# Altium PCB S7CAS-PLEIADES-CARTE-MERE_P06.PcbDoc (part 3 of 3)
Units mil, origin at the board's own origin, x right, y up, seen from the top; angles counter-clockwise.
Board outline 5000 x 5000 mil, 12 copper layers (Top Layer, GND1, SIG1, GND2, PWR1, GND3, GND4, PWR2, GND5, SIG2, GND6, Bottom), stack 47.089 mil thick; 447 components, 336 nets, 2150 pads, 232 vias.
Unrouted connection lines stored in the file: 1376.
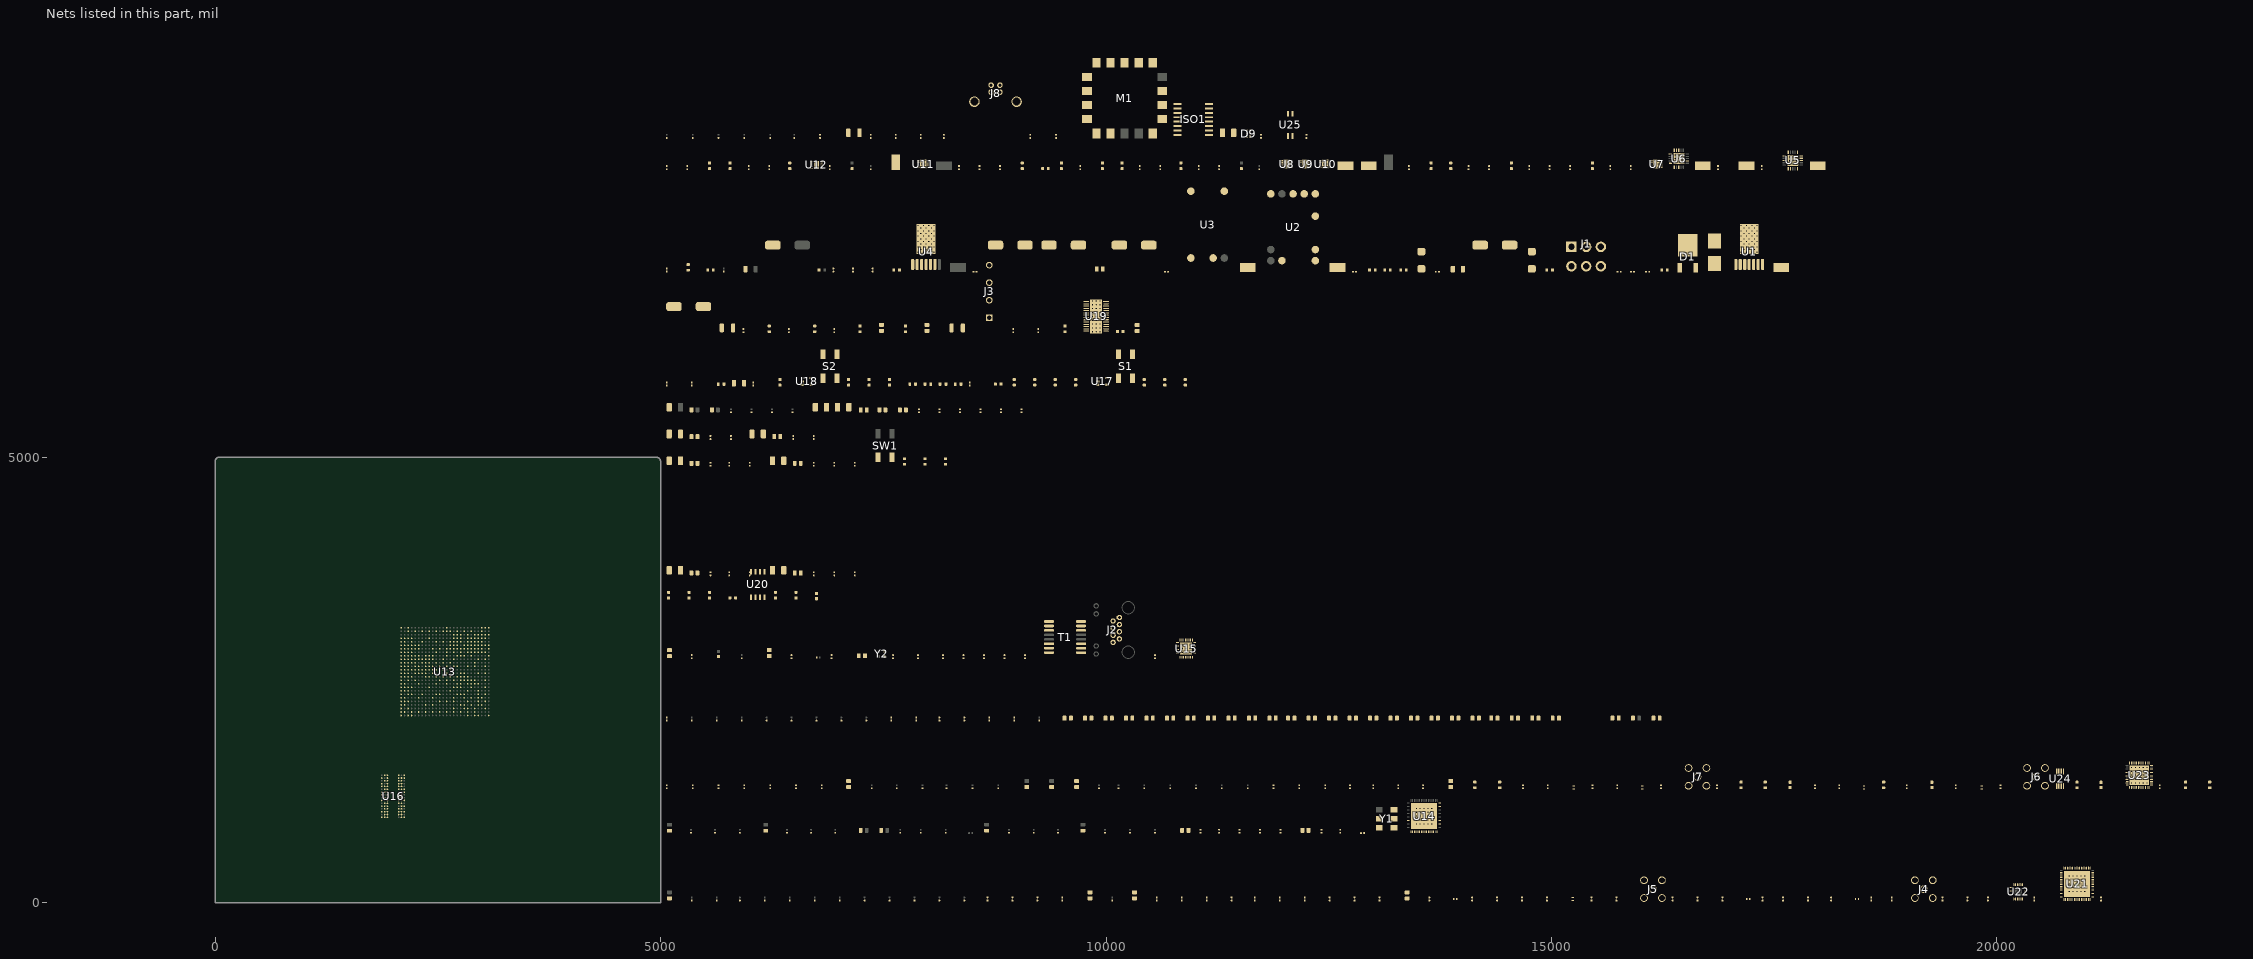
[diagram p11: the nets of this part, all layers, seen from the top]

## Via types
v1: diameter 19.68, hole 7.87, Top Layer to Bottom, 106 vias
v2: diameter 20, hole 10, Top Layer to Bottom, 78 vias
v3: diameter 15.75, hole 7.87, Top Layer to Bottom, 30 vias
v4: diameter 22, hole 12, Top Layer to Bottom, 9 vias
v5: diameter 19.68, hole 11.81, Top Layer to Bottom, 9 vias

## Nets (pads, with @x,y where several pads share a name; then routed paths per layer and width w, separated by ;. In a path a pad name is that pad's centre, name@x,y a point inside that pad or via, vN(x,y) a via of type N, cw(c..) or ccw(c..) an arc to the next point about the centre after c; other vN are vias at no path point) (continued)
3V3D: C26.2 C30.2 C32.2 C44.2 C45.2 C46.2 C47.2 C48.2 C49.2 C50.2 C51.2 C52.2 C53.2 C54.2 C55.2 C56.2 C57.2 C58.2 C59.2 C60.2 C61.2 C62.2 C63.2 C64.2 C65.2 C66.2 C67.2 C68.2 C69.2 C70.2 C71.2 C79.2 C80.2 C81.2 C82.2 C83.2 C84.2 C85.2 C86.2 C87.2 C88.2 C89.2 C90.2 C127.2 C128.2 C149.2 C150.2 ISO1.12 ISO1.13 ISO1.14 ISO1.16 L1.2 M1.2 M1.8 M1.15 R13.2 R16.2 R17.2 R18.2 R28.2 R29.2 R30.2 R33.2 R34.2 R69.2 R70.2 R72.2 R73.2 R74.2 R75.2 R77.2 R78.2 R81.2 R84.2 R110.2 R111.2 S1.3 S1.4 S2.3 S2.4 TP7.1 TP8.1 TP9.1 U7.9 U7.10 U8.9 U8.10 U9.9 U9.10 U13.AA6 U13.AA10 U13.AA16 U13.AA21 U13.AB14 U13.AB23 U13.AC10 U13.AC18 U13.AC21 U13.AD25 U13.AE8 U13.AE12 U13.AE16 U13.AE20 U13.AF22 U13.B3 U13.B7 U13.B11 U13.B15 U13.B19 U13.C22 U13.D2 U13.D9 U13.D17 U13.D25 U13.E13 U13.F4 U13.F6 U13.F21 U13.F23 U13.G10 U13.G12 U13.G15 U13.G18 U13.H2 U13.H14 U13.H25 U13.J6 U13.J9 U13.J18 U13.J21 U13.K4 U13.K13 U13.K23 U13.L5 U13.L22 U13.M2 U13.M17 U13.M20 U13.M25 U13.N10 U13.P23 U13.T25 U13.U6 U13.U14 U13.U18 U13.V9 U13.V21 U13.W23 U13.Y12 U13.Y17 U13.Y19 U13.Y25 U14.8 U14.11 U14.18 U14.21 U14.26 U14.29 U14.32 U15.17 U17.3 U18.3 U19.10 U25.4
3V3FLASH: C102.2 R89.2 R90.2 R92.2 R93.2 U20.8
3V6: C10.1 C25.2 C29.2 C31.2 C33.2 C38.2 C40.2 TP2.1 U2.5 U2.6 U7.1 U7.2 U7.4 U8.1 U8.2 U8.4 U8.5 U9.1 U9.2 U9.4 U10.1 U10.2 U10.4 U11.1 U11.2 U11.4 U12.1 U12.2 U12.3
5V: C20.2 C192.2 C193.2 C194.2 C195.2 C196.2 TP5.1 U5.1 U5.3 U5.20 U22.3 U22.4 U22.9 U22.10 U22.14 U22.20 U24.8
5V8: C4.2 C5.2 C6.1 C8.1 C9.2 C12.2 C13.2 C14.2 C19.2 R2.2 R8.2 TP1.1 U1.7 U2.2 U2.10 U3.2 U4.1 U5.15 U5.16
5VA: C214.2 C215.2
24V: C1.2 C2.2 C3.2 C151.2 C153.2 C155.2 C159.1 D1.3 D2.1 R1.2 R80.2 U1.1 U19.15 U19.28
100M_CLK_N: U13.A14 U14.28
100M_CLK_P: U13.B14 U14.27
200M_CLK_N: C163.2 R95.1 U14.20
200M_CLK_P: C162.2 R95.2 U14.19
400M_CLK_N: C200.2 R116.1 U14.17
400M_CLK_P: C199.2 R116.2 U14.16
-5V: C23.2 C24.2 C174.2 C175.2 C176.2 C177.2 C178.2 R12.2 TP6.1 U6.1 U6.20 U22.15 U22.16 U22.21 U22.22 U24.4
-5V5: C11.2 C22.2 TP3.1 U3.5 U6.15 U6.16
-5VA: C231.2 C232.2
ADC_AVDD: C167.2 C168.2 C169.2 C170.2 C171.2 C172.2 C173.2 L12.1 U21.16 U21.33 U21.34
ADC_CLKOUT_N: U13.G5 U21.56
ADC_CLKOUT_P: U13.G6 U21.57
ADC_CM: C161.2 C165.2 U21.23 U22.11 U22.17
ADC_CTRL1: U13.J10 U21.35
ADC_CTRL2: U13.K9 U21.36
ADC_CTRL3: U13.E4 U21.37
ADC_DA0_N: U13.L8 U21.40
ADC_DA0_P: U13.K8 U21.41
ADC_DA2_N: U13.N1 U21.42
ADC_DA2_P: U13.N2 U21.43
ADC_DA4_N: U13.M1 U21.44
ADC_DA4_P: U13.M3 U21.45
ADC_DA6_N: U13.L1 U21.46
ADC_DA6_P: U13.L2 U21.47
ADC_DA8_N: U13.K1 U21.50
ADC_DA8_P: U13.K3 U21.51
ADC_DA10_N: U13.J1 U21.52
ADC_DA10_P: U13.J2 U21.53
ADC_DA12_N: U13.H1 U21.54
ADC_DA12_P: U13.H3 U21.55
ADC_DB0_N: U13.G1 U21.60
ADC_DB0_P: U13.G2 U21.61
ADC_DB2_N: U13.F1 U21.62
ADC_DB2_P: U13.F3 U21.63
ADC_DB4_N: U13.E1 U21.2
ADC_DB4_P: U13.E2 U21.3
ADC_DB6_N: U13.D1 U21.4
ADC_DB6_P: U13.D3 U21.5
ADC_DB8_N: U13.J3 U21.6
ADC_DB8_P: U13.J4 U21.7
ADC_DB10_N: U13.K6 U21.8
ADC_DB10_P: U13.K7 U21.9
ADC_DB12_N: U13.J5 U21.10
ADC_DB12_P: U13.K5 U21.11
ADC_Reset: U13.G4 U21.12
ADC_SCLK: U13.G3 U21.13
ADC_SDATA: U13.L9 U21.14
ADC_SDOUT: U13.F5 U21.64
ADC_SEN: U13.K10 U21.15
BTN0: C147.2 R68.2 U13.D18
BTN1: C148.2 R76.2 U13.C18
CLK_N: U14.46 Y1.5
CLK_P: U14.45 Y1.4
CLOCK_PWRDN: R31.1 U13.Y18
CLOCK_SPI_CLK: U13.AC19 U14.24
CLOCK_SPI_LE: U13.AA19 U14.25
CLOCK_SPI_MISO: U13.V16 U14.22
CLOCK_SPI_MOSI: U13.AD19 U14.23
DAC_AVDD: C208.2 C209.2 C210.2 C211.2 C212.2 C213.2 C218.2 C225.2 C226.2 C227.2 C228.2 C229.2 C230.2 L17.1 U23.37 U23.40 U23.45 U23.48
DAC_CLK_N: U13.A25 U23.18
DAC_CLK_P: U13.B24 U23.17
DAC_CS: U13.H24 U23.33
DAC_D0_N: U13.G21 U23.28
DAC_D0_P: U13.G20 U23.27
DAC_D1_N: U13.C24 U23.26
DAC_D1_P: U13.D23 U23.25
DAC_D2_N: U13.D22 U23.24
DAC_D2_P: U13.F22 U23.23
DAC_D3_N: U13.H21 U23.22
DAC_D3_P: U13.H20 U23.21
DAC_D4_N: U13.G22 U23.16
DAC_D4_P: U13.H22 U23.15
DAC_D5_N: U13.E24 U23.14
DAC_D5_P: U13.E23 U23.13
DAC_D6_N: U13.G24 U23.12
DAC_D6_P: U13.G23 U23.11
DAC_D7_N: U13.G19 U23.10
DAC_D7_P: U13.H18 U23.9
DAC_FRAME_N: U13.C26 U23.20
DAC_FRAME_P: U13.C25 U23.19
DAC_IRQ: R110.1 U13.G26 U23.34
DAC_RST: R111.1 U13.D24 U23.36
DAC_SDIO: U13.F26 U23.31
DAC_TX_EN: U13.J26 U23.30
DDR3_A0: R43.1 U13.N7 U16.N3
DDR3_A1: R44.1 U13.N6 U16.P7
DDR3_A2: R45.1 U13.R9 U16.P3
DDR3_A3: R46.1 U13.P7 U16.N2
DDR3_A4: R47.1 U13.N9 U16.P8
DDR3_A5: R48.1 U13.R2 U16.P2
DDR3_A6: R49.1 U13.R1 U16.R8
DDR3_A7: R50.1 U13.P10 U16.R2
DDR3_A8: R51.1 U13.N4 U16.T8
DDR3_A9: R52.1 U13.N3 U16.R3
DDR3_A10: R53.1 U13.M10 U16.L7
DDR3_A11: R54.1 U13.L3 U16.R7
DDR3_A12: R55.1 U13.M8 U16.N7
DDR3_A13: R56.1 U13.M6 U16.T3
DDR3_BA0: R57.1 U13.P3 U16.M2
DDR3_BA1: R58.1 U13.P1 U16.N8
DDR3_BA2: R59.1 U13.N5 U16.M3
DDR3_CAS: R63.1 U13.P8 U16.K3
DDR3_CKE0: R60.1 U13.M9 U16.K9
DDR3_CLK0_N: R66.1 U13.R3 U16.K7
DDR3_CLK0_P: R66.2 U13.R4 U16.J7
DDR3_CS: R61.1 U13.L7 U16.L2
DDR3_DQ0: U13.Y3 U16.E3
DDR3_DQ1: U13.Y1 U16.F7
DDR3_DQ2: U13.W2 U16.F2
DDR3_DQ3: U13.W1 U16.F8
DDR3_DQ4: U13.T3 U16.H3
DDR3_DQ5: U13.T1 U16.H8
DDR3_DQ6: U13.U2 U16.G2
DDR3_DQ7: U13.U1 U16.H7
DDR3_DQ8: U13.AA2 U16.D7
DDR3_DQ9: U13.AA1 U16.C3
DDR3_DQ10: U13.AE2 U16.C8
DDR3_DQ11: U13.AE1 U16.C2
DDR3_DQ12: U13.AD3 U16.A7
DDR3_DQ13: U13.AD1 U16.A2
DDR3_DQ14: U13.AB3 U16.B8
DDR3_DQ15: U13.AB1 U16.A3
DDR3_LDM: U13.W3 U16.E7
DDR3_LDQS_N: U13.V1 U16.G3
DDR3_LDQS_P: U13.V3 U16.F3
DDR3_ODT: R65.1 U13.P6 U16.K1
DDR3_RAS: R62.1 U13.N8 U16.J3
DDR3_RESET: R42.2 U13.L4 U16.T2
DDR3_UDM: U13.V4 U16.D3
DDR3_UDQS_N: U13.AC1 U16.B7
DDR3_UDQS_P: U13.AC2 U16.C7
DDR3_WE: R64.1 U13.P5 U16.L3
DDRVTT: C140.2 C141.2 C142.2 C143.2 C144.2 C145.2 R43.2 R44.2 R45.2 R46.2 R47.2 R48.2 R49.2 R50.2 R51.2 R52.2 R53.2 R54.2 R55.2 R56.2 R57.2 R58.2 R59.2 R60.2 R61.2 R62.2 R63.2 R64.2 R65.2
DONE_2: R28.1 SW1.1 U13.AF23
ENABLE: R16.1 U5.13 U6.13 U7.5 U8.3 U9.5 U10.5 U11.5 U12.5
ETH_COL: U13.R17 U15.28
ETH_CRS: U13.R18 U15.29
ETH_INTRP: R34.1 U13.T22 U15.21
ETH_MDC: U13.R19 U15.12
ETH_MDIO: R33.1 U13.R20 U15.11
ETH_Reset: U13.P18 U15.32
ETH_RXC: U13.V17 U15.19
ETH_RXD0: U13.T19 U15.16
ETH_RXD1: U13.U21 U15.15
ETH_RXD2: U13.U22 U15.14
ETH_RXD3: U13.U17 U15.13
ETH_RXDV: U13.U23 U15.18
ETH_RXER: U13.T18 U15.20
ETH_TXC: U13.V18 U15.22
ETH_TXD0: U13.T20 U15.24
ETH_TXD1: U13.U20 U15.25
ETH_TXD2: U13.AC23 U15.26
ETH_TXD3: U13.AC24 U15.27
ETH_TXEN: U13.AA23 U15.23
ETH_TXER: U13.AA24 U15.31
GND: C1.1 C2.1 C3.1 C4.1 C5.1 C6.2 C7.1 C8.2 C9.1 C10.2 C11.1 C12.1 C13.1 C14.1 C15.1 C16.1 C17.2 C18.1 C19.1 C20.1 C21.1 C22.1 C24.1 C25.1 C26.1 C27.1 C28.1 C29.1 C30.1 C31.1 C32.1 C33.1 C34.1 C35.1 C36.1 C37.1 C38.1 C39.1 C40.1 C41.1 C42.1 C43.1 C44.1 C45.1 C46.1 C47.1 C48.1 C49.1 C50.1 C51.1 C52.1 C53.1 C54.1 C55.1 C56.1 C57.1 C58.1 C59.1 C60.1 C61.1 C62.1 C63.1 C64.1 C65.1 C66.1 C67.1 C68.1 C69.1 C70.1 C71.1 C72.1 C73.1 C74.1 C75.1 C76.1 C77.1 C78.1 C79.1 C80.1 C81.1 C82.1 C83.1 C84.1 C85.1 C86.1 C87.1 C88.1 C89.1 C90.1 C91.1 C92.1 C93.1 C94.1 C95.1 C96.1 C97.1 C98.1 C99.1 C100.1 C101.1 C102.1 C103.1 C104.1 C105.1 C106.1 C108.1 C109.1 C110.1 C111.1 C113.1 C114.1 C115.1 C116.1 C118.1 C119.1 C120.1 C121.1 C122.1 C123.1 C124.2 C125.1 C126.1 C127.1 C128.1 C129.1 C130.1 C132.1 C133.1 C134.1 C135.1 C136.1 C137.1 C138.1 C139.1 C140.1 C141.1 C142.1 C143.1 C144.1 C145.1 C146.1 C147.1 C148.1 C149.1 C150.1 C151.1 C152.1 C155.1 C156.1 C157.1 C158.1 C159.2 C161.1 C165.1 C167.1 C168.1 C169.1 C170.1 C171.1 C172.1 C173.1 C174.1 C175.1 C176.1 C177.1 C178.1 C179.1 C180.1 C181.1 C182.1 C183.1 C184.1 C185.1 C186.1 C187.1 C188.1 C189.1 C190.1 C191.1 C192.1 C193.1 C194.1 C195.1 C196.1 C197.1 C202.1 C203.1 C204.1 C205.1 C206.1 C207.1 C208.1 C209.1 C210.1 C211.1 C212.1 C213.1 C214.1 C215.1 C216.1 C217.1 C218.1 C219.1 C220.1 C221.1 C222.1 C223.1 C224.1 C225.1 C226.1 C227.1 C228.1 C229.1 C230.1 C231.1 C232.1 C236.1 C237.1 C238.1 C239.1 C240.1 C241.1 C242.1 D3.2 D8.K ISO1.9 ISO1.15 J1.4 J1.5 J1.6 J4.2 J4.3 J4.4 J4.5 J5.2 J5.3 J5.4 J5.5 J6.2 J6.3 J6.4 J6.5 J7.2 J7.3 J7.4 J7.5 M1.1 M1.7 M1.14 R3.1 R4.1 R5.1 R6.1 R7.1 R10.1 R11.1 R14.1 R15.1 R20.1 R21.1 R22.1 R25.1 R26.1 R32.1 R39.1 R41.1 R42.1 R67.1 R71.1 R79.1 R82.1 R83.1 R85.1 R86.1 R87.1 R88.1 R94.1 R99.1 R100.2 R106.1 R107.2 R113.1 R118.1 R119.1 R120.1 R125.1 R126.1 R127.1 R129.1 SW1.3 U1.2 U1.4 U1.8 U2.3 U2.4 U2.7 U3.1 U4.2 U4.4 U4.8 U5.6 U5.7 U5.10 U5.E1 U6.7 U6.21 U7.6 U7.11 U8.6 U8.11 U9.6 U9.11 U10.6 U10.11 U11.6 U11.11 U12.4 U12.8 U12.11 U13.A1 U13.A3 U13.A26 U13.AB2 U13.AB12 U13.AB16 U13.AB20 U13.AB25 U13.AC8 U13.AD16 U13.AE6 U13.AE10 U13.AE14 U13.AE18 U13.AE22 U13.AF1 U13.AF26 U13.B5 U13.B9 U13.B13 U13.B17 U13.B21 U13.D4 U13.E7 U13.E11 U13.E15 U13.E22 U13.F2 U13.F19 U13.F25 U13.H4 U13.H11 U13.H23 U13.J8 U13.J19 U13.K2 U13.K16 U13.K25 U13.L11 U13.L13 U13.L15 U13.M5 U13.M12 U13.M14 U13.M16 U13.M22 U13.N11 U13.N13 U13.N15 U13.P2 U13.P12 U13.P14 U13.P16 U13.P19 U13.P25 U13.R8 U13.R11 U13.R13 U13.R15 U13.T5 U13.T12 U13.T14 U13.T16 U13.T21 U13.U11 U13.V2 U13.V25 U13.W15 U13.W20 U13.Y4 U13.Y7 U13.Y11 U13.Y23 U14.36 U14.43 U14.PAD U15.1 U15.33 U15.34 U15.35 U15.36 U15.37 U15.38 U15.39 U15.40 U15.41 U15.42 U16.A9 U16.B1 U16.B3 U16.B9 U16.D1 U16.D8 U16.E1 U16.E2 U16.E8 U16.F9 U16.G1 U16.G8 U16.G9 U16.J2 U16.J8 U16.M1 U16.M9 U16.P1 U16.P9 U16.T1 U16.T9 U17.2 U18.2 U19.7 U19.21 U19.PAD U20.4 U21.17 U21.18 U21.21 U21.24 U21.27 U21.28 U21.31 U21.32 U21.39 U21.49 U21.59 U21.PAD U23.5 U23.41 U23.44 U23.PAD Y1.3 Y2.2
  other v1: 20813.39,123.39 20856.69,123.39 20900,123.39 20943.31,123.39 20986.61,123.39 20813.39,166.69 20856.69,166.69 20900,166.69 20943.31,166.69 20986.61,166.69 20813.39,210 20856.69,210 20900,210 20943.31,210 20986.61,210 20813.39,253.31 20856.69,253.31 20900,253.31 20943.31,253.31 20986.61,253.31 20813.39,296.61 20856.69,296.61 20900,296.61 20943.31,296.61 20986.61,296.61 13483.39,883.39 13526.69,883.39 13570,883.39 13613.31,883.39 13656.61,883.39 13483.39,926.69 13526.69,926.69 13570,926.69 13613.31,926.69 13656.61,926.69 13483.39,970 13526.69,970 13570,970 13613.31,970 13656.61,970 13483.39,1013.31 13526.69,1013.31 13570,1013.31 13613.31,1013.31 13656.61,1013.31 13483.39,1056.61 13526.69,1056.61 13570,1056.61 13613.31,1056.61 13656.61,1056.61 21513.39,1343.39 21556.69,1343.39 21600,1343.39 21643.31,1343.39 21686.61,1343.39 21513.39,1386.69 21556.69,1386.69 21600,1386.69 21643.31,1386.69 21686.61,1386.69 21513.39,1430 21556.69,1430 21600,1430 21643.31,1430 21686.61,1430 21513.39,1473.31 21556.69,1473.31 21600,1473.31 21643.31,1473.31 21686.61,1473.31 21513.39,1516.61 21556.69,1516.61 21600,1516.61 21643.31,1516.61 21686.61,1516.61 9846.69,6406.77 9890,6406.77 9933.31,6406.77 9846.69,6450.08 9890,6450.08 9933.31,6450.08 9846.69,6493.39 9890,6493.39 9933.31,6493.39 9846.69,6536.69 9890,6536.69 9933.31,6536.69 9846.69,6580 9890,6580 9933.31,6580 9846.69,6623.31 9890,6623.31 9933.31,6623.31 9846.69,6666.61 9890,6666.61 9933.31,6666.61 9846.69,6709.92 9890,6709.92 9933.31,6709.92 9846.69,6753.23 9890,6753.23 9933.31,6753.23
  other v2: 7890,7300 7950,7300 8010,7300 8070,7300 17130,7300 17190,7300 17250,7300 17310,7300 7920,7330 7980,7330 8040,7330 17160,7330 17220,7330 17280,7330 7890,7360 7950,7360 8010,7360 8070,7360 17130,7360 17190,7360 17250,7360 17310,7360 7920,7390 7980,7390 8040,7390 17160,7390 17220,7390 17280,7390 7890,7420 7950,7420 8010,7420 8070,7420 17130,7420 17190,7420 17250,7420 17310,7420 7920,7450 7980,7450 8040,7450 17160,7450 17220,7450 17280,7450 7890,7480 7950,7480 8010,7480 8070,7480 17130,7480 17190,7480 17250,7480 17310,7480 7920,7510 7980,7510 8040,7510 17160,7510 17220,7510 17280,7510 7890,7540 7950,7540 8010,7540 8070,7540 17130,7540 17190,7540 17250,7540 17310,7540 7920,7570 7980,7570 8040,7570 17160,7570 17220,7570 17280,7570 7890,7600 7950,7600 8010,7600 8070,7600 17130,7600 17190,7600 17250,7600 17310,7600
  other v3: 7930.31,8250.63 7969.69,8250.63 12010.31,8250.63 12049.69,8250.63 12220.31,8250.63 12259.69,8250.63 12440.31,8250.63 12479.69,8250.63 16160.32,8250.63 16199.68,8250.63 7930.31,8290 7969.69,8290 12010.31,8290 12049.69,8290 12220.31,8290 12259.69,8290 12440.31,8290 12479.69,8290 16160.32,8290 16199.68,8290 7930.31,8329.37 7969.69,8329.37 12010.31,8329.37 12049.69,8329.37 12220.31,8329.37 12259.69,8329.37 12440.31,8329.37 12479.69,8329.37 16160.32,8329.37 16199.68,8329.37
  other v4: 17670.63,8290.63 17710,8290.63 17749.37,8290.63 17670.63,8330 17710,8330 17749.37,8330 17670.63,8369.37 17710,8369.37 17749.37,8369.37
  other v5: 16390.63,8310.63 16430,8310.63 16469.37,8310.63 16390.63,8350 16430,8350 16469.37,8350 16390.63,8389.37 16430,8389.37 16469.37,8389.37
"GND USB": C233.1 C234.1 C235.2 C236.2 D9.3 D9.8 ISO1.2 ISO1.8 J8.4 R134.1 U25.2
JTAG_TCK: M1.10 U13.E21
JTAG_TDI: M1.12 U13.F20
JTAG_TDO: M1.11 U13.A24
JTAG_TMS: M1.13 U13.C23
LED0: D4.K U13.E18
LED1: D5.K U13.E20
LED2: D6.K U13.D20
LED3: D7.K U13.J17
MTR_Dir: U13.F17 U19.3
MTR_Enable: U13.C16 U19.26
MTR_Home: U13.C17 U19.2
MTR_Reset: U13.D16 U19.17
MTR_Sleep: U13.G16 U19.27
MTR_SR: U13.E16 U19.16
MTR_Step: U13.F15 U19.19
MTR_USM0: U13.E17 U19.13
MTR_USM1: U13.F16 U19.12
NetC7_2: C7.2 U1.6
NetC18_2: C18.2 U4.6
NetC21_2: C21.2 U5.14
NetC23_1: C23.1 R12.1 R14.2 U6.3
NetC27_2: C27.2 U6.14
NetC28_2: C28.2 U7.7
NetC35_2: C35.2 U8.7
NetC36_2: C36.2 U9.7
NetC37_2: C37.2 U10.7
NetC42_2: C42.2 U12.6
NetC43_2: C43.2 U11.7
NetC91_2: C91.2 C92.2 L1.1 Y1.2 Y1.6
NetC93_2: C93.2 U14.38
NetC94_2: C94.2 U14.4
NetC95_2: C95.2 U14.48
NetC96_2: C96.2 R31.2 U14.12
NetC122_2: C122.2 T1.7
NetC123_2: C123.2 T1.2
NetC124_1: C124.1 R35.1 R36.1 R37.1 R38.1
NetC152_2: C152.2 U19.20
NetC153_1: C153.1 U19.22
NetC154_1: C154.1 U19.24
NetC154_2: C154.2 U19.23
NetC156_2: C156.2 R84.1 R85.2 U19.5
NetC157_2: C157.2 R86.2 U19.6
NetC158_2: C158.2 R87.2 U19.9
NetC162_1: C162.1 U21.25
NetC163_1: C163.1 U21.26
NetC164_1: C164.1 R101.1 U21.29
NetC164_2: C164.2 R98.1 U21.30
NetC166_1: C166.1 R108.1 U21.19
NetC166_2: C166.2 R105.1 U21.20
NetC197_2: C197.2 U23.42
NetC198_1: C198.1 L14.2 R117.1
NetC198_2: C198.2 L13.2 R114.1
NetC199_1: C199.1 U23.6
NetC200_1: C200.1 U23.7
NetC201_1: C201.1 L16.2 R124.1
NetC201_2: C201.2 L15.2 R122.1
NetC235_1: C235.1 ISO1.3 ISO1.4 ISO1.5
NetD1_1: D1.1 D2.2 R5.2
NetD1_4: D1.4 D3.1 F1.2
NetD4_A: D4.A R72.1
NetD5_A: D5.A R73.1
NetD6_A: D6.A R74.1
NetD7_A: D7.A R75.1
NetD8_A: D8.A R80.1
NetF1_1: F1.1 J1.1 J1.2 J1.3
NetJ2_1: J2.1 T1.16
NetJ2_2: J2.2 T1.14
NetJ2_3: J2.3 T1.11
NetJ2_4: J2.4 J2.5 R37.2
NetJ2_6: J2.6 T1.9
NetJ2_7: J2.7 J2.8 R38.2
NetJ3_1: J3.1 U19.4
NetJ3_2: J3.2 U19.25
NetJ3_3: J3.3 U19.11
NetJ3_4: J3.4 U19.18
NetJ4_1: J4.1 R97.2 R99.2
NetJ5_1: J5.1 R104.2 R106.2
NetJ6_1: J6.1 R115.2
NetJ7_1: J7.1 R123.2
NetL8_1: L8.1 U22.19
NetL8_2: L8.2 R98.2
NetL9_1: L9.1 U22.18
NetL9_2: L9.2 R101.2
NetL10_1: L10.1 U22.13
NetL10_2: L10.2 R105.2
NetL11_1: L11.1 U22.12
NetL11_2: L11.2 R108.2
NetL13_1: L13.1 R119.2 U23.47
NetL14_1: L14.1 R120.2 U23.46
NetL15_1: L15.1 R126.2 U23.38
NetL16_1: L16.1 R127.2 U23.39
NetR1_1: R1.1 R3.2 U1.3
NetR2_1: R2.1 R4.2 U1.5
NetR6_2: R6.2 U2.8
NetR7_2: R7.2 U3.4
NetR8_1: R8.1 R10.2 U4.3
NetR9_1: R9.1 R11.2 U4.5
NetR13_1: R13.1 R15.2 U7.8
NetR17_1: R17.1 R20.2 U8.8
NetR18_1: R18.1 R21.2 U9.8
NetR19_1: R19.1 R22.2 U10.8
NetR23_1: R23.1 R25.2 U11.8
NetR24_1: R24.1 R26.2 U12.7
NetR27_2: U13.G14
NetR29_1: R29.1 U13.AF3
NetR30_1: R30.1 U13.AE4
NetR32_2: R32.2 U14.30
NetR35_2: R35.2 T1.15
NetR36_2: R36.2 T1.10
NetR39_2: R39.2 U15.10
NetR67_2: R67.2 U16.L8
NetR68_1: R68.1 R71.2 S1.1 S1.2
NetR76_1: R76.1 R79.2 S2.1 S2.2
NetR81_1: R81.1 R82.2 U19.8
NetR83_2: R83.2 U19.1
NetR88_2: R88.2 U19.14
NetR91_1: R91.1 U20.2
NetR96_1: R96.1 U22.23
NetR96_2: R96.2 R97.1 U22.24
NetR100_1: R100.1 R102.2 U22.1
NetR102_1: R102.1 U22.2
NetR103_1: R103.1 U22.5
NetR103_2: R103.2 R104.1 U22.6
NetR107_1: R107.1 R109.2 U22.7
NetR109_1: R109.1 U22.8
NetR112_1: R112.1 R115.1 U24.1
NetR112_2: R112.2 R114.2 U24.2
NetR113_2: R113.2 U23.43
NetR117_2: R117.2 R118.2 U24.3
NetR121_1: R121.1 R123.1 U24.7
NetR121_2: R121.2 R122.2 U24.6
NetR124_2: R124.2 R125.2 U24.5
NetR128_1: R128.1 U25.1
NetT1_1: T1.1 U15.7
NetT1_3: T1.3 U15.6
NetT1_6: T1.6 U15.5
NetT1_8: T1.8 U15.4
NetU15_9: U15.9 Y2.3
"Shield USB": J8.5 J8.6 R134.2
SPI_FLASH_CS: R90.1 U13.AF4 U20.1
SPI_FLASH_MISO: R89.1 U13.AD20 U20.5
SPI_FLASH_MOSI: R91.2 U13.AF20
SPI_FLASH_SCLK: R92.1 R94.2 U13.AD22 U20.6
SPI_SCLK: U13.F24 U23.32
TEMP_SCLK_0: R69.1 U13.H16 U17.4
TEMP_SCLK_1: R77.1 U13.D21 U18.4
TEMP_SDA_0: R70.1 U13.G17 U17.5
TEMP_SDA_1: R78.1 U13.C20 U18.5
UART_RX: M1.5 U13.J14
UART_TX: M1.6
USB_CON_N: D9.4 D9.7 J8.2 R130.2
USB_CON_P: D9.5 D9.6 J8.3 R132.2
USB_DD_N: ISO1.11 R131.2
USB_DD_P: ISO1.10 R133.2
USB_N: M1.16 R131.1
USB_P: M1.17 R133.1
USB_UD_N: ISO1.6 R130.1
USB_UD_P: ISO1.7 R132.1
USB_VBUS_DETECT: M1.18 R129.2 U25.3
VBUS: C233.2 C234.2 D9.1 D9.2 D9.9 D9.10 ISO1.1 J8.1 R128.2
VDD_A: C129.2 C130.2 L7.1 U15.3
VREF: C131.1 C146.2 R40.1 R41.2 U16.H1 U16.M8
VTTDDR: C41.2 R24.2 TP12.1 U12.9 U12.10
WP_HOLD: R93.1 U20.3 U20.7
pads on no net: J1.0 J2.0 J2.9 J2.10 J2.11 J2.12 M1.3 M1.4 M1.9 SW1.2 SW1.4 T1.4 T1.5 T1.12 T1.13 U2.1 U2.9 U2.11 U3.3 U5.2 U5.4 U5.5 U5.8 U5.9 U5.11 U5.12 U5.17 U5.18 U5.19 U6.2 U6.4 U6.5 U6.6 U6.8 U6.9 U6.10 U6.11 U6.12 U6.17 U6.18 U6.19 U7.3 U9.3 U10.3 U11.3 U13.A2 U13.A4 U13.A5 U13.A6 U13.A7 U13.A8 U13.A9 U13.A10 U13.A11 U13.A12 U13.A13 U13.A15 U13.A16 U13.A17 U13.A18 U13.A19 U13.A20 U13.A21 U13.A22 U13.A23 U13.AA3 U13.AA4 U13.AA5 U13.AA7 U13.AA8 U13.AA9 U13.AA11 U13.AA12 U13.AA13 U13.AA14 U13.AA15 U13.AA17 U13.AA18 U13.AA20 U13.AA22 U13.AA25 U13.AA26 U13.AB4 U13.AB5 U13.AB6 U13.AB7 U13.AB8 U13.AB9 U13.AB10 U13.AB11 U13.AB13 U13.AB15 U13.AB17 U13.AB18 U13.AB19 U13.AB21 U13.AB22 U13.AB24 U13.AB26 U13.AC3 U13.AC4 U13.AC5 U13.AC7 U13.AC9 U13.AC11 U13.AC12 U13.AC13 U13.AC14 U13.AC15 U13.AC16 U13.AC17 U13.AC20 U13.AC22 U13.AC25 U13.AC26 U13.AD4 U13.AD5 U13.AD6 U13.AD7 U13.AD8 U13.AD9 U13.AD10 U13.AD11 U13.AD12 U13.AD13 U13.AD14 U13.AD15 U13.AD17 U13.AD18 U13.AD21 U13.AD23 U13.AD24 U13.AD26 U13.AE3 U13.AE5 U13.AE7 U13.AE9 U13.AE11 U13.AE13 U13.AE15 U13.AE17 U13.AE19 U13.AE21 U13.AE23 U13.AE24 U13.AE25 U13.AE26 U13.AF2 U13.AF5 U13.AF6 U13.AF7 U13.AF8 U13.AF9 U13.AF10 U13.AF11 U13.AF12 U13.AF13 U13.AF14 U13.AF15 U13.AF16 U13.AF17 U13.AF18 U13.AF19 U13.AF21 U13.AF24 U13.AF25 U13.B1 U13.B2 U13.B4 U13.B6 U13.B8 U13.B10 U13.B12 U13.B16 U13.B18 U13.B20 U13.B22 U13.B23 U13.B25 U13.B26 U13.C1 U13.C2 U13.C3 U13.C4 U13.C5 U13.C6 U13.C7 U13.C8 U13.C9 U13.C10 U13.C11 U13.C12 U13.C13 U13.C14 U13.C15 U13.C19 U13.C21 U13.D5 U13.D6 U13.D7 U13.D8 U13.D10 U13.D11 U13.D12 U13.D13 U13.D14 U13.D15 U13.D19 U13.D26 U13.E3 U13.E5 U13.E6 U13.E8 U13.E9 U13.E10 U13.E12 U13.E14 U13.E19 U13.E25 U13.E26 U13.F7 U13.F8 U13.F9 U13.F10 U13.F11 U13.F12 U13.F13 U13.F14 U13.F18 U13.G7 U13.G8 U13.G9 U13.G11 U13.G13 U13.G25 U13.H5 U13.H6 U13.H7 U13.H8 U13.H9 U13.H10 U13.H12 U13.H13 U13.H15 U13.H17 U13.H19 U13.H26 U13.J7 U13.J11 U13.J12 U13.J13 U13.J15 U13.J16 U13.J20 U13.J22 U13.J23 U13.J24 U13.J25 U13.K12 U13.K14 U13.K15 U13.K18 U13.K19 U13.K20 U13.K21 U13.K22 U13.K24 U13.K26 U13.L6 U13.L17 U13.L18 U13.L19 U13.L20 U13.L21 U13.L23 U13.L24 U13.L25 U13.L26 U13.M4 U13.M18 U13.M19 U13.M21 U13.M23 U13.M24 U13.M26 U13.N17 U13.N18 U13.N19 U13.N20 U13.N21 U13.N22 U13.N23 U13.N24 U13.N25 U13.N26 U13.P17 U13.P20 U13.P21 U13.P22 U13.P24 U13.P26 U13.R5 U13.R6 U13.R7 U13.R10 U13.R21 U13.R22 U13.R23 U13.R24 U13.R25 U13.R26 U13.T4 U13.T6 U13.T8 U13.T9 U13.T10 U13.T23 U13.T24 U13.T26 U13.U3 U13.U4 U13.U5 U13.U7 U13.U8 U13.U9 U13.U12 U13.U13 U13.U15 U13.U19 U13.U24 U13.U25 U13.U26 U13.V5 U13.V6 U13.V7 U13.V8 U13.V10 U13.V11 U13.V12 U13.V13 U13.V14 U13.V15 U13.V19 U13.V20 U13.V22 U13.V23 U13.V24 U13.V26 U13.W5 U13.W7 U13.W8 U13.W9 U13.W10 U13.W11 U13.W12 U13.W13 U13.W14 U13.W16 U13.W17 U13.W18 U13.W19 U13.W21 U13.W22 U13.W24 U13.W25 U13.W26 U13.Y5 U13.Y6 U13.Y8 U13.Y9 U13.Y10 U13.Y13 U13.Y14 U13.Y15 U13.Y16 U13.Y20 U13.Y21 U13.Y22 U13.Y24 U13.Y26 U14.2 U14.3 U14.6 U14.7 U14.9 U14.10 U14.13 U14.14 U14.15 U14.31 U14.33 U14.37 U14.40 U14.41 U14.44 U14.49 U14.50 U14.51 U14.52 U14.53 U14.54 U14.55 U14.56 U14.57 U14.58 U14.59 U14.60 U14.61 U14.62 U14.63 U14.64 U15.8 U15.30 U16.J1 U16.J9 U16.L1 U16.L9 U16.M7 U16.T7 U17.1 U18.1 U21.22 U22.PAD U23.3 U23.4 Y1.1 Y2.1
copper on no net: | length 19957.1
  Top Layer w5: 0,0 0,4950 cw(c50,4950) 50,5000 4950,5000 cw(c4950,4950) 5000,4950 5000,0 0,0
  other v1: 20218.35,98.35 20261.65,98.35 20218.35,141.65 20261.65,141.65

## Polygon pours and split planes (outlines as drawn)
no net on GND1 (split plane): 4954.69,4979.62 4959.27,4978.52 4963.62,4976.72 4967.63,4974.26 4971.21,4971.21 4974.26,4967.63 4976.72,4963.62 4978.52,4959.27 4979.62,4954.69 4979.95,4950.5 4979.9,4950 4979.9,20.1 20.1,20.1 20.1,4950 20.05,4950.5 20.38,4954.69 21.48,4959.27 23.28,4963.62 25.74,4967.63 28.79,4971.21 32.37,4974.26 36.38,4976.72 40.73,4978.52 45.31,4979.62 49.5,4979.95 50,4979.9 4950,4979.9 4950.5,4979.95
no net on GND2 (split plane): 4954.69,4979.62 4959.27,4978.52 4963.62,4976.72 4967.63,4974.26 4971.21,4971.21 4974.26,4967.63 4976.72,4963.62 4978.52,4959.27 4979.62,4954.69 4979.95,4950.5 4979.9,4950 4979.9,20.1 20.1,20.1 20.1,4950 20.05,4950.5 20.38,4954.69 21.48,4959.27 23.28,4963.62 25.74,4967.63 28.79,4971.21 32.37,4974.26 36.38,4976.72 40.73,4978.52 45.31,4979.62 49.5,4979.95 50,4979.9 4950,4979.9 4950.5,4979.95
no net on PWR1 (split plane): 4954.69,4979.62 4959.27,4978.52 4963.62,4976.72 4967.63,4974.26 4971.21,4971.21 4974.26,4967.63 4976.72,4963.62 4978.52,4959.27 4979.62,4954.69 4979.95,4950.5 4979.9,4950 4979.9,20.1 20.1,20.1 20.1,4950 20.05,4950.5 20.38,4954.69 21.48,4959.27 23.28,4963.62 25.74,4967.63 28.79,4971.21 32.37,4974.26 36.38,4976.72 40.73,4978.52 45.31,4979.62 49.5,4979.95 50,4979.9 4950,4979.9 4950.5,4979.95
no net on GND3 (split plane): 4954.69,4979.62 4959.27,4978.52 4963.62,4976.72 4967.63,4974.26 4971.21,4971.21 4974.26,4967.63 4976.72,4963.62 4978.52,4959.27 4979.62,4954.69 4979.95,4950.5 4979.9,4950 4979.9,20.1 20.1,20.1 20.1,4950 20.05,4950.5 20.38,4954.69 21.48,4959.27 23.28,4963.62 25.74,4967.63 28.79,4971.21 32.37,4974.26 36.38,4976.72 40.73,4978.52 45.31,4979.62 49.5,4979.95 50,4979.9 4950,4979.9 4950.5,4979.95
no net on GND4 (split plane): 4954.69,4979.62 4959.27,4978.52 4963.62,4976.72 4967.63,4974.26 4971.21,4971.21 4974.26,4967.63 4976.72,4963.62 4978.52,4959.27 4979.62,4954.69 4979.95,4950.5 4979.9,4950 4979.9,20.1 20.1,20.1 20.1,4950 20.05,4950.5 20.38,4954.69 21.48,4959.27 23.28,4963.62 25.74,4967.63 28.79,4971.21 32.37,4974.26 36.38,4976.72 40.73,4978.52 45.31,4979.62 49.5,4979.95 50,4979.9 4950,4979.9 4950.5,4979.95
no net on PWR2 (split plane): 4954.69,4979.62 4959.27,4978.52 4963.62,4976.72 4967.63,4974.26 4971.21,4971.21 4974.26,4967.63 4976.72,4963.62 4978.52,4959.27 4979.62,4954.69 4979.95,4950.5 4979.9,4950 4979.9,20.1 20.1,20.1 20.1,4950 20.05,4950.5 20.38,4954.69 21.48,4959.27 23.28,4963.62 25.74,4967.63 28.79,4971.21 32.37,4974.26 36.38,4976.72 40.73,4978.52 45.31,4979.62 49.5,4979.95 50,4979.9 4950,4979.9 4950.5,4979.95
no net on GND5 (split plane): 4954.69,4979.62 4959.27,4978.52 4963.62,4976.72 4967.63,4974.26 4971.21,4971.21 4974.26,4967.63 4976.72,4963.62 4978.52,4959.27 4979.62,4954.69 4979.95,4950.5 4979.9,4950 4979.9,20.1 20.1,20.1 20.1,4950 20.05,4950.5 20.38,4954.69 21.48,4959.27 23.28,4963.62 25.74,4967.63 28.79,4971.21 32.37,4974.26 36.38,4976.72 40.73,4978.52 45.31,4979.62 49.5,4979.95 50,4979.9 4950,4979.9 4950.5,4979.95
no net on GND6 (split plane): 4954.69,4979.62 4959.27,4978.52 4963.62,4976.72 4967.63,4974.26 4971.21,4971.21 4974.26,4967.63 4976.72,4963.62 4978.52,4959.27 4979.62,4954.69 4979.95,4950.5 4979.9,4950 4979.9,20.1 20.1,20.1 20.1,4950 20.05,4950.5 20.38,4954.69 21.48,4959.27 23.28,4963.62 25.74,4967.63 28.79,4971.21 32.37,4974.26 36.38,4976.72 40.73,4978.52 45.31,4979.62 49.5,4979.95 50,4979.9 4950,4979.9 4950.5,4979.95

## Silkscreen, mask and mechanical layers (free items; w line width, h text height)
Top Overlay:
  rectangle: -1261.38,2160.75 -752.79,2464.02
  lines w5: -1520,3460 -1520,3700 -430,3700 -430,3460 -1520,3460
  text "0" at -1322.86,4100 h787.4
  text ".Project_Name" at -1928.77,3700 h78.74
  text ".Project_Global" at -1478.77,3480 h39.37
  text ".Project_Revision" at -1340,3306.31 h40
  text "Revision" at -1243.7,3306.31 h40
  text ".Project_DateCode" at -1310,3240 h40
  text "Designed by:" at -1266,3100 h36
  text ".Project_Designer1" at -1313.15,3050.76 h36
  text ".Project_Designer2" at -1313.15,2980.51 h36
  text ".Project_Designer3" at -1313.15,2910.25 h36
  text ".Project_Designer4" at -1313.15,2840 h36
  text "Serial #" at -1264.6,2447.17 h39.37

## Text inside footprints (layer, text, board x,y; h text height)
C6: Drill Guide "Verified by : Alexandre Imbeault" at 14160.63,7098.5 h31.5; Drill Guide "Created by : Alexandre Gaudet" at 14159.65,7131.97 h31.5; Drill Guide "Date : 2013-04-17" at 14161.61,7067.01 h31.5
C8: Drill Guide "Verified by : Alexandre Imbeault" at 9320.63,7098.5 h31.5; Drill Guide "Created by : Alexandre Gaudet" at 9319.65,7131.97 h31.5; Drill Guide "Date : 2013-04-17" at 9321.61,7067.01 h31.5
C10: Drill Guide "Verified by : Alexandre Imbeault" at 10110.63,7098.5 h31.5; Drill Guide "Created by : Alexandre Gaudet" at 10109.65,7131.97 h31.5; Drill Guide "Date : 2013-04-17" at 10111.61,7067.01 h31.5
C11: Drill Guide "Verified by : Alexandre Imbeault" at 8720.63,7098.5 h31.5; Drill Guide "Created by : Alexandre Gaudet" at 8719.65,7131.97 h31.5; Drill Guide "Date : 2013-04-17" at 8721.61,7067.01 h31.5
C17: Drill Guide "Verified by : Alexandre Imbeault" at 6220.63,7098.5 h31.5; Drill Guide "Created by : Alexandre Gaudet" at 6219.65,7131.97 h31.5; Drill Guide "Date : 2013-04-17" at 6221.61,7067.01 h31.5
C159: Drill Guide "Verified by : Alexandre Imbeault" at 5110.63,6408.5 h31.5; Drill Guide "Created by : Alexandre Gaudet" at 5109.65,6441.97 h31.5; Drill Guide "Date : 2013-04-17" at 5111.61,6377.01 h31.5
D4: Top Overlay "+" at 7770.94,5839.69 h19.68
D5: Top Overlay "+" at 7940.94,5839.69 h19.68
D6: Top Overlay "+" at 8110.94,5839.69 h19.68
D7: Top Overlay "+" at 8280.94,5839.69 h19.68
D8: Top Overlay "+" at 5620.94,5839.69 h19.68
J2: Top Overlay "*" at 10420,3425 h65 r90
J3: Top Overlay "1" at 8725.43,6391.5 h65 r90; Top Assembly "INSERT WIRES ON THIS SIDE" at 8894.72,6474.17 h31.5 r90
U20: Top Overlay "RefDes" at 6115,3495 h50 r90; Top Overlay "*" at 5998,3403.5 h50 r90; Top Overlay "REFDES" at 6115,3482.5 h50 r90; Top 3D Models "RefDes2" at 6115,3482.5 h50 r90; Top 3D Models "*" at 6038,3466.5 h50 r90